# Altium PCB FPv1.3.5.PcbDoc (part 8 of 9)
Units mil, origin at the board's own origin, x right, y up, seen from the top; angles counter-clockwise.
Board outline 3200 x 2100 mil, 4 copper layers (Top Layer, GROUND PLANE, POWER PLANE, Bottom Layer); 98 components, 183 nets, 614 pads, 312 vias.
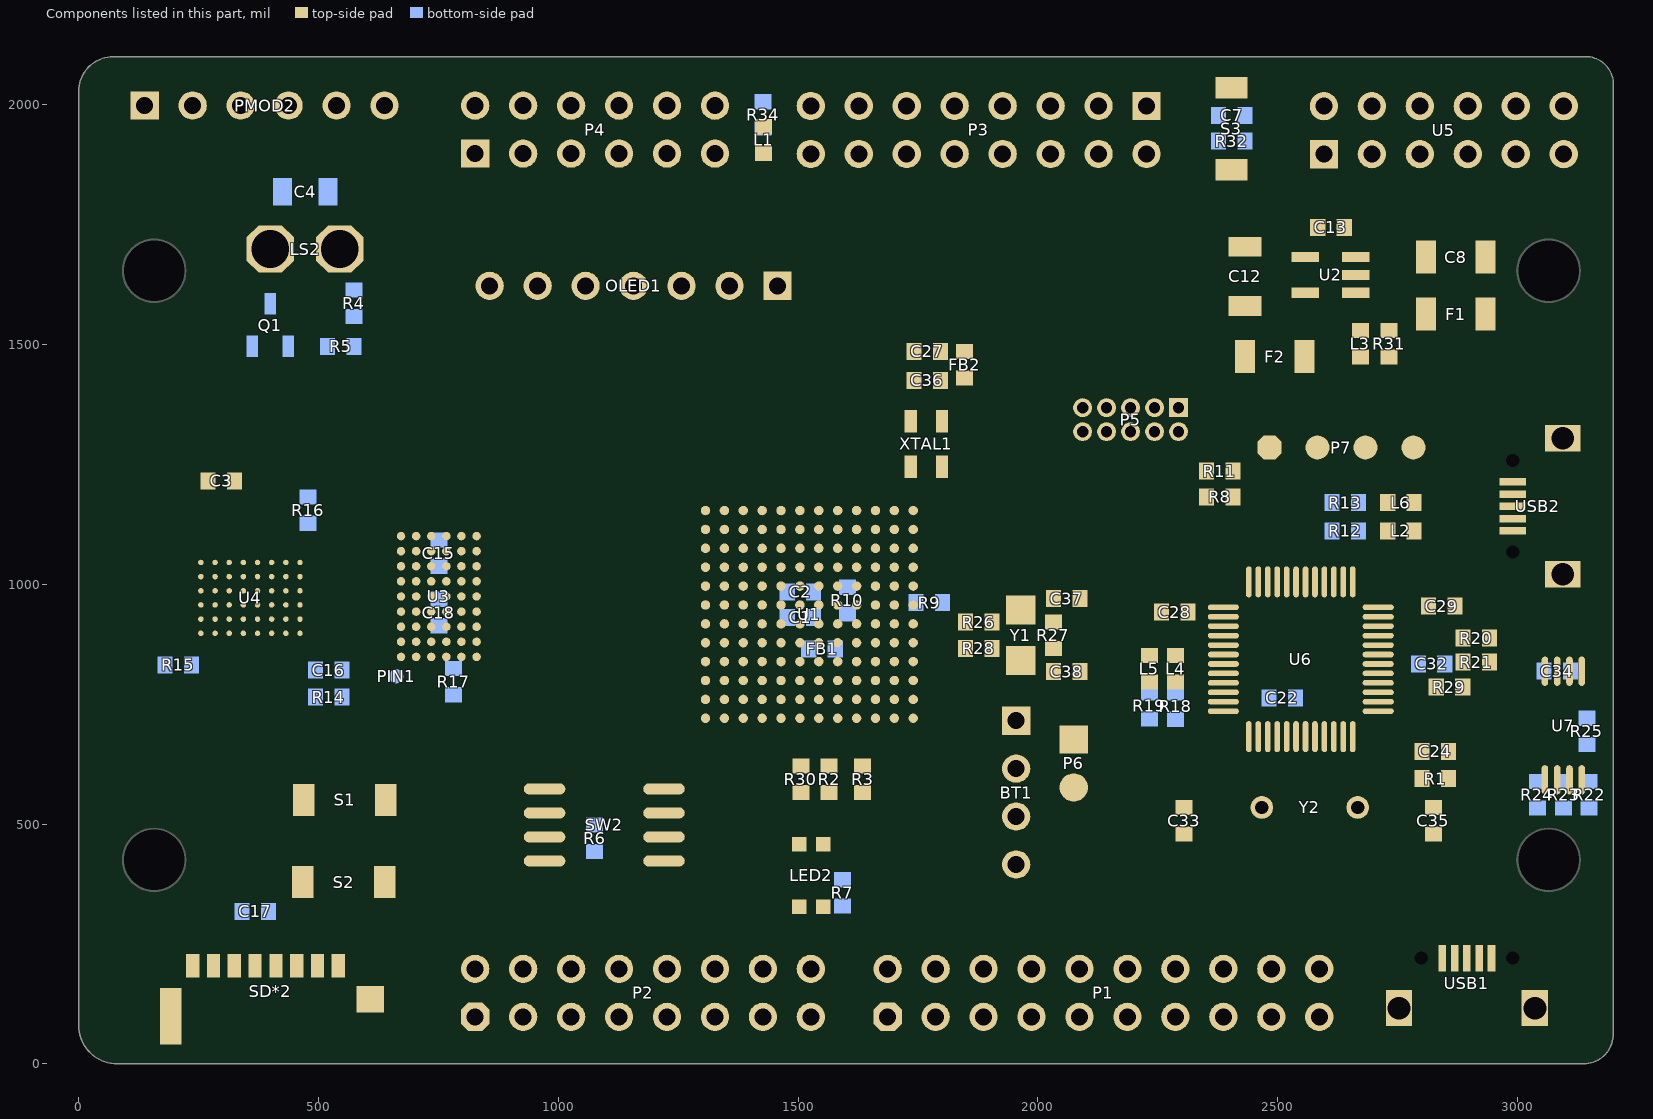
[diagram p10: the components of this part, seen from the top]

## Via types
v1: diameter 15.87, hole 7.87, Top Layer to Bottom Layer, tented both sides, 261 vias
v2: diameter 19.8, hole 11.81, Top Layer to Bottom Layer, tented both sides, 25 vias
v3: diameter 23.62, hole 15.75, Top Layer to Bottom Layer, tented both sides, 11 vias
v4: diameter 20, hole 13, Top Layer to Bottom Layer, tented both sides, 5 vias
v5: diameter 27.68, hole 15.75, Top Layer to Bottom Layer, tented both sides, 3 vias
v6: diameter 23.74, hole 15.75, Top Layer to Bottom Layer, tented both sides, 2 vias
v7: diameter 19.8, hole 9.84, Top Layer to Bottom Layer, tented both sides, 2 vias
v8: diameter 23.62, hole 9.45, Top Layer to Bottom Layer, tented both sides, 1 vias
v9: diameter 17.24, hole 9.06, Top Layer to Bottom Layer, tented both sides, 1 vias
v10: diameter 23.74, hole 11.81, Top Layer to Bottom Layer, tented both sides, 1 vias

## Nets (pads, with @x,y where several pads share a name; then routed paths per layer and width w, separated by ;. In a path a pad name is that pad's centre, name@x,y a point inside that pad or via, vN(x,y) a via of type N, cw(c..) or ccw(c..) an arc to the next point about the centre after c; other vN are vias at no path point) (continued)
copper on no net: (continued)
  Top Layer w1: 2051,1582 2053,1582 ; 2051,1583 2053,1583 ; 2051,1584 2053,1584 ; 2051,1585 2053,1585 ; 2051,1586 2053,1586 ; 2051,1587 2053,1587 ; 2051,1588 2053,1588 ; 2051,1589 2053,1589 ; 2051,1590 2053,1590 ; 2051,1591 2053,1591 ; 2051,1592 2053,1592 ; 2051,1593 2053,1593 ; 2051,1594 2053,1594 ; 2051,1595 2053,1595 ; 2051,1596 2053,1596 ; 2051,1597 2053,1597 ; 2051,1598 2053,1598 ; 2052,1571 2054,1571 ; 2052,1572 2054,1572 ; 2052,1573 2054,1573 ; 2052,1574 2054,1574 ; 2052,1575 2054,1575 ; 2052,1576 2054,1576 ; 2052,1577 2054,1577 ; 2052,1578 2054,1578 ; 2052,1579 2054,1579 ; 2052,1580 2053,1580 ; 2052,1581 2053,1581 ; 2052,1599 2053,1599 ; 2052,1600 2053,1600 ; 2052,1601 2053,1601 ; 2052,1602 2054,1602 ; 2052,1603 2054,1603 ; 2052,1604 2054,1604 ; 2052,1605 2054,1605 ; 2052,1606 2054,1606 ; 2052,1607 2054,1607 ; 2052,1608 2054,1608 ; 2052,1609 2054,1609 ; 2053,1564 2055,1564 ; 2053,1565 2055,1565 ; 2053,1566 2055,1566 ; 2053,1567 2055,1567 ; 2053,1568 2055,1568 ; 2053,1569 2055,1569 ; 2053,1570 2054,1570 ; 2053,1610 2054,1610 ; 2053,1611 2055,1611 ; 2053,1612 2055,1612 ; 2053,1613 2055,1613 ; 2053,1614 2055,1614 ; 2053,1615 2055,1615 ; 2053,1616 2055,1616 ; 2054,1559 2056,1559 ; 2054,1560 2056,1560 ; 2054,1561 2056,1561 ; 2054,1562 2056,1562 ; 2054,1563 2056,1563 ; 2054,1617 2055,1617 ; 2054,1618 2056,1618 ; 2054,1619 2056,1619 ; 2054,1620 2056,1620 ; 2054,1621 2056,1621 ; 2055,1555 2057,1555 ; 2055,1556 2057,1556 ; 2055,1557 2057,1557 ; 2055,1558 2057,1558 ; 2055,1622 2056,1622 ; 2055,1623 2057,1623 ; 2055,1624 2057,1624 ; 2055,1625 2057,1625 ; 2055,1626 2057,1626 ; 2056,1551 2058,1551 ; 2056,1552 2058,1552 ; 2056,1553 2058,1553 ; 2056,1554 2058,1554 ; 2056,1627 2058,1627 ; 2056,1628 2058,1628 ; 2056,1629 2058,1629 ; 2056,1630 2058,1630 ; 2057,1547 2059,1547 ; 2057,1548 2059,1548 ; 2057,1549 2059,1549 ; 2057,1550 2059,1550 ; 2057,1631 2059,1631 ; 2057,1632 2059,1632 ; 2057,1633 2059,1633 ; 2058,1544 2060,1544 ; 2058,1545 2060,1545 ; 2058,1546 2060,1546 ; 2058,1634 2060,1634 ; 2058,1635 2060,1635 ; 2058,1636 2060,1636 ; 2058,1637 2061,1637 ; 2059,1541 2061,1541 ; 2059,1542 2061,1542 ; 2059,1543 2061,1543 ; 2059,1638 2061,1638 ; 2059,1639 2061,1639 ; 2059,1640 2062,1640 ; 2060,1538 2062,1538 ; 2060,1539 2062,1539 ; 2060,1540 2062,1540 ; 2060,1641 2062,1641 ; 2060,1642 2062,1642 ; 2060,1643 2063,1643 ; 2061,1535 2064,1535 ; 2061,1536 2063,1536 ; 2061,1537 2063,1537 ; 2061,1644 2063,1644 ; 2061,1645 2063,1645 ; 2062,1533 2064,1533 ; 2062,1534 2064,1534 ; 2062,1593 2064,1593 ; 2062,1594 2064,1594 ; 2062,1595 2064,1595 ; 2062,1596 2064,1596 ; 2062,1597 2064,1597 ; 2062,1646 2064,1646 ; 2062,1647 2064,1647 ; 2062,1648 2065,1648 ; 2063,1530 2066,1530 ; 2063,1531 2065,1531 ; 2063,1532 2065,1532 ; 2063,1591 2066,1591 ; 2063,1592 2065,1592 ; 2063,1598 2065,1598 ; 2063,1599 2066,1599 ; 2063,1649 2065,1649 ; 2063,1650 2065,1650 ; 2064,1528 2067,1528 ; 2064,1529 2066,1529 ; 2064,1569 2083,1569 ; 2064,1570 2082,1570 ; 2064,1581 2083,1581 ; 2064,1582 2083,1582 ; 2064,1590 2068,1590 ; 2064,1600 2081,1600 ; 2064,1610 2068,1610 ; 2064,1611 2069,1611 ; 2064,1621 2069,1621 ; 2064,1622 2068,1622 ; 2064,1651 2066,1651 ; 2064,1652 2066,1652 ; 2065,1526 2067,1526 ; 2065,1527 2067,1527 ; 2065,1589 2081,1589 ; 2065,1601 2081,1601 ; 2065,1609 2072,1609 ; 2065,1623 2071,1623 ; 2065,1653 2067,1653 ; 2065,1654 2067,1654 ; 2066,1524 2068,1524 ; 2066,1525 2068,1525 ; 2066,1563 2074,1563 ; 2066,1564 2069,1564 ; 2066,1612 2073,1612 ; 2066,1620 2073,1620 ; 2066,1655 2068,1655 ; 2066,1656 2068,1656 ; 2066,1657 2069,1657 ; 2067,1522 2069,1522 ; 2067,1523 2069,1523 ; 2067,1588 2081,1588 ; 2067,1658 2069,1658 ; 2067,1659 2070,1659 ; 2068,1520 2070,1520 ; 2068,1521 2070,1521 ; 2068,1549 2070,1549 ; 2068,1550 2072,1550 ; 2068,1624 2076,1624 ; 2068,1660 2070,1660 ; 2068,1661 2071,1661 ; 2069,1518 2072,1518 ; 2069,1519 2071,1519 ; 2069,1551 2073,1551 ; 2069,1562 2079,1562 ; 2069,1608 2076,1608 ; 2069,1662 2071,1662 ; 2070,1516 2073,1516 ; 2070,1517 2072,1517 ; 2070,1544 2075,1544 ; 2070,1613 2077,1613 ; 2070,1619 2077,1619 ; 2070,1663 2072,1663 ; 2070,1664 2072,1664 ; 2071,1514 2074,1514 ; 2071,1515 2073,1515 ; 2071,1543 2072,1543 ; 2071,1545 2077,1545 ; 2071,1552 2075,1552 ; 2071,1665 2073,1665 ; 2071,1666 2073,1666 ; 2072,1513 2074,1513 ; 2072,1553 2077,1553 ; 2072,1559 2074,1559 ; 2072,1560 2074,1560 ; 2072,1561 2084,1561 ; 2072,1625 2080,1625 ; 2072,1667 2074,1667 ; 2072,1668 2075,1668 ; 2073,1511 2076,1511 ; 2073,1512 2075,1512 ; 2073,1554 2078,1554 ; 2073,1555 2075,1555 ; 2073,1556 2075,1556 ; 2073,1557 2074,1557 ; 2073,1558 2074,1558 ; 2073,1571 2075,1571 ; 2073,1572 2075,1572 ; 2073,1573 2075,1573 ; 2073,1574 2075,1574 ; 2073,1575 2075,1575 ; 2073,1576 2075,1576 ; 2073,1577 2075,1577 ; 2073,1578 2075,1578 ; 2073,1579 2075,1579 ; 2073,1580 2075,1580 ; 2073,1607 2080,1607 ; 2073,1669 2075,1669 ; 2074,1509 2077,1509 ; 2074,1510 2076,1510 ; 2074,1546 2080,1546 ; 2074,1614 2080,1614 ; 2074,1618 2080,1618 ; 2074,1670 2076,1670 ; 2074,1671 2077,1671 ; 2075,1508 2077,1508 ; 2075,1532 2078,1532 ; 2075,1533 2080,1533 ; 2075,1534 2083,1534 ; 2075,1672 2077,1672 ; 2075,1673 2078,1673 ; 2076,1506 2079,1506 ; 2076,1507 2078,1507 ; 2076,1535 2079,1535 ; 2076,1536 2079,1536 ; 2076,1547 2082,1547 ; 2076,1555 2080,1555 ; 2076,1606 2083,1606 ; 2076,1626 2083,1626 ; 2076,1674 2078,1674 ; 2077,1505 2079,1505 ; 2077,1537 2080,1537 ; 2077,1615 2083,1615 ; 2077,1617 2082,1617 ; 2077,1675 2079,1675 ; 2077,1676 2080,1676 ; 2078,1503 2081,1503 ; 2078,1504 2080,1504 ; 2078,1538 2080,1538 ; 2078,1539 2081,1539 ; 2078,1556 2082,1556 ; 2078,1677 2081,1677 ; 2079,1502 2082,1502 ; 2079,1540 2082,1540 ; 2079,1548 2087,1548 ; 2079,1557 2083,1557 ; 2079,1560 2085,1560 ; 2079,1678 2081,1678 ; 2079,1679 2082,1679 ; 2080,1500 2083,1500 ; 2080,1501 2082,1501 ; 2080,1535 2085,1535 ; 2080,1541 2082,1541 ; 2080,1542 2083,1542 ; 2080,1605 2083,1605 ; 2080,1616 2082,1616 ; 2080,1627 2083,1627 ; 2080,1680 2083,1680 ; 2081,1499 2084,1499 ; 2081,1543 2084,1543 ; 2081,1549 2088,1549 ; 2081,1558 2085,1558 ; 2081,1681 2083,1681 ; 2082,1498 2085,1498 ; 2082,1536 2088,1536 ; 2082,1544 2084,1544 ; 2082,1682 2084,1682 ; 2082,1683 2085,1683 ; 2083,1497 2085,1497 ; 2083,1545 2085,1545 ; 2083,1546 2086,1546 ; 2083,1559 2085,1559 ; 2083,1684 2086,1684 ; 2084,1495 2087,1495 ; 2084,1496 2086,1496 ; 2084,1513 2087,1513 ; 2084,1514 2086,1514 ; 2084,1515 2086,1515 ; 2084,1516 2086,1516 ; 2084,1517 2087,1517 ; 2084,1547 2087,1547 ; 2084,1550 2088,1550 ; 2084,1685 2087,1685 ; 2085,1494 2088,1494 ; 2085,1511 2088,1511 ; 2085,1512 2087,1512 ; 2085,1518 2088,1518 ; 2085,1537 2090,1537 ; 2085,1686 2087,1686 ; 2086,1493 2089,1493 ; 2086,1510 2089,1510 ; 2086,1519 2089,1519 ; 2086,1551 2087,1551 ; 2086,1687 2088,1687 ; 2086,1688 2089,1688 ; 2087,1492 2089,1492 ; 2087,1509 2096,1509 ; 2087,1520 2090,1520 ; 2087,1538 2092,1538 ; 2087,1689 2090,1689 ; 2088,1490 2091,1490 ; 2088,1491 2090,1491 ; 2088,1521 2091,1521 ; 2088,1690 2091,1690 ; 2089,1489 2092,1489 ; 2089,1508 2094,1508 ; 2089,1522 2092,1522 ; 2089,1691 2092,1691 ; 2090,1488 2093,1488 ; 2090,1523 2093,1523 ; 2090,1539 2092,1539 ; 2090,1692 2093,1692 ; 2091,1487 2094,1487 ; 2091,1524 2094,1524 ; 2091,1693 2093,1693 ; 2092,1486 2095,1486 ; 2092,1525 2095,1525 ; 2092,1579 2103,1579 ; 2092,1580 2103,1580 ; 2092,1581 2103,1581 ; 2092,1582 2103,1582 ; 2092,1583 2103,1583 ; 2092,1584 2103,1584 ; 2092,1585 2103,1585 ; 2092,1586 2103,1586 ; 2092,1587 2103,1587 ; 2092,1588 2104,1588 ; 2092,1589 2104,1589 ; 2092,1590 2104,1590 ; 2092,1591 2104,1591 ; 2092,1592 2104,1592 ; 2092,1593 2105,1593 ; 2092,1594 2105,1594 ; 2092,1595 2105,1595 ; 2092,1596 2105,1596 ; 2092,1597 2106,1597 ; 2092,1598 2106,1598 ; 2092,1599 2106,1599 ; 2092,1600 2107,1600 ; 2092,1601 2107,1601 ; 2092,1694 2094,1694 ; 2093,1485 2096,1485 ; 2093,1510 2097,1510 ; 2093,1526 2096,1526 ; 2093,1572 2102,1572 ; 2093,1573 2102,1573 ; 2093,1574 2102,1574 ; 2093,1575 2102,1575 ; 2093,1576 2102,1576 ; 2093,1577 2102,1577 ; 2093,1578 2102,1578 ; 2093,1602 2107,1602 ; 2093,1603 2108,1603 ; 2093,1604 2108,1604 ; 2093,1605 2108,1605 ; 2093,1606 2109,1606 ; 2093,1607 2109,1607 ; 2093,1608 2110,1608 ; 2093,1609 2110,1609 ; 2093,1695 2095,1695 ; 2093,1696 2096,1696 ; 2094,1484 2097,1484 ; 2094,1501 2097,1501 ; 2094,1527 2096,1527 ; 2094,1566 2103,1566 ; 2094,1567 2103,1567 ; 2094,1568 2102,1568 ; 2094,1569 2102,1569 ; 2094,1570 2102,1570 ; 2094,1571 2102,1571 ; 2094,1610 2110,1610 ; 2094,1611 2111,1611 ; 2094,1612 2111,1612 ; 2094,1613 2112,1613 ; 2094,1614 2112,1614 ; 2094,1697 2097,1697 ; 2095,1483 2098,1483 ; 2095,1500 2096,1500 ; 2095,1502 2098,1502 ; 2095,1511 2098,1511 ; 2095,1562 2103,1562 ; 2095,1563 2103,1563 ; 2095,1564 2103,1564 ; 2095,1565 2103,1565 ; 2095,1615 2113,1615 ; 2095,1616 2113,1616 ; 2095,1617 2114,1617 ; 2095,1618 2114,1618 ; 2095,1698 2098,1698 ; 2096,1482 2099,1482 ; 2096,1503 2099,1503 ; 2096,1512 2099,1512 ; 2096,1559 2104,1559 ; 2096,1560 2103,1560 ; 2096,1561 2103,1561 ; 2096,1619 2115,1619 ; 2096,1620 2115,1620 ; 2096,1621 2116,1621 ; 2096,1622 2117,1622 ; 2096,1699 2099,1699 ; 2097,1481 2100,1481 ; 2097,1504 2100,1504 ; 2097,1513 2100,1513 ; 2097,1555 2105,1555 ; 2097,1556 2104,1556 ; 2097,1557 2104,1557 ; 2097,1558 2104,1558 ; 2097,1623 2117,1623 ; 2097,1624 2118,1624 ; 2097,1625 2118,1625 ; 2097,1700 2100,1700 ; 2098,1480 2101,1480 ; 2098,1505 2101,1505 ; 2098,1514 2101,1514 ; 2098,1553 2105,1553 ; 2098,1554 2105,1554 ; 2098,1626 2119,1626 ; 2098,1627 2120,1627 ; 2098,1628 2120,1628 ; 2098,1701 2101,1701 ; 2099,1479 2102,1479 ; 2099,1506 2102,1506 ; 2099,1515 2102,1515 ; 2099,1550 2106,1550 ; 2099,1551 2106,1551 ; 2099,1552 2105,1552 ; 2099,1629 2121,1629 ; 2099,1630 2122,1630 ; 2099,1631 2123,1631 ; 2099,1693 2104,1693 ; 2099,1694 2104,1694 ; 2099,1702 2102,1702 ; 2100,1478 2103,1478 ; 2100,1507 2103,1507 ; 2100,1516 2103,1516 ; 2100,1547 2107,1547 ; 2100,1548 2107,1548 ; 2100,1549 2106,1549 ; 2100,1632 2123,1632 ; 2100,1633 2124,1633 ; 2100,1692 2105,1692 ; 2100,1695 2102,1695 ; 2101,1477 2104,1477 ; 2101,1508 2104,1508 ; 2101,1517 2104,1517 ; 2101,1545 2108,1545 ; 2101,1546 2107,1546 ; 2101,1634 2125,1634 ; 2101,1635 2126,1635 ; 2101,1669 2105,1669 ; 2101,1670 2105,1670 ; 2101,1671 2105,1671 ; 2101,1680 2104,1680 ; 2101,1691 2106,1691 ; 2101,1703 2104,1703 ; 2102,1476 2105,1476 ; 2102,1509 2105,1509 ; 2102,1518 2105,1518 ; 2102,1543 2109,1543 ; 2102,1544 2108,1544 ; 2102,1636 2126,1636 ; 2102,1637 2127,1637 ; 2102,1638 2128,1638 ; 2102,1672 2106,1672 ; 2102,1681 2105,1681 ; 2102,1682 2105,1682 ; 2102,1690 2106,1690 ; 2102,1704 2105,1704 ; 2103,1475 2106,1475 ; 2103,1492 2105,1492 ; 2103,1493 2106,1493 ; 2103,1494 2107,1494 ; 2103,1495 2108,1495 ; 2103,1496 2109,1496 ; 2103,1510 2108,1510 ; 2103,1519 2104,1519 ; 2103,1541 2109,1541 ; 2103,1542 2109,1542 ; 2103,1639 2129,1639 ; 2103,1640 2130,1640 ; 2103,1673 2106,1673 ; 2103,1674 2106,1674 ; 2103,1683 2105,1683 ; 2103,1684 2106,1684 ; 2103,1685 2105,1685 ; 2103,1689 2107,1689 ; 2103,1705 2106,1705 ; 2104,1474 2108,1474 ; 2104,1497 2106,1497 ; 2104,1498 2106,1498 ; 2104,1499 2106,1499 ; 2104,1500 2106,1500 ; 2104,1501 2106,1501 ; 2104,1511 2108,1511 ; 2104,1539 2111,1539 ; 2104,1540 2110,1540 ; 2104,1641 2131,1641 ; 2104,1642 2132,1642 ; 2104,1675 2108,1675 ; 2104,1688 2107,1688 ; 2104,1706 2107,1706 ; 2105,1502 2107,1502 ; 2105,1503 2107,1503 ; 2105,1504 2107,1504 ; 2105,1505 2107,1505 ; 2105,1506 2107,1506 ; 2105,1512 2109,1512 ; 2105,1537 2112,1537 ; 2105,1538 2111,1538 ; 2105,1643 2133,1643 ; 2105,1644 2134,1644 ; 2105,1676 2107,1676 ; 2105,1677 2108,1677 ; 2105,1687 2108,1687 ; 2105,1707 2108,1707 ; 2106,1473 2109,1473 ; 2106,1507 2108,1507 ; 2106,1508 2108,1508 ; 2106,1509 2108,1509 ; 2106,1513 2108,1513 ; 2106,1535 2114,1535 ; 2106,1536 2113,1536 ; 2106,1645 2135,1645 ; 2106,1678 2111,1678 ; 2106,1679 2110,1679 ; 2106,1686 2109,1686 ; 2106,1708 2109,1708 ; 2107,1472 2110,1472 ; 2107,1497 2110,1497 ; 2107,1533 2116,1533 ; 2107,1534 2115,1534 ; 2107,1646 2136,1646 ; 2107,1647 2137,1647 ; 2107,1668 2109,1668 ; 2107,1669 2108,1669 ; 2107,1680 2110,1680 ; 2107,1681 2113,1681 ; 2107,1684 2111,1684 ; 2107,1685 2112,1685 ; 2107,1709 2111,1709 ; 2108,1471 2111,1471 ; 2108,1498 2111,1498 ; 2108,1532 2117,1532 ; 2108,1648 2138,1648 ; 2108,1649 2139,1649 ; 2108,1658 2111,1658 ; 2108,1659 2112,1659 ; 2108,1665 2109,1665 ; 2108,1666 2110,1666 ; 2108,1667 2110,1667 ; 2108,1671 2110,1671 ; 2108,1672 2111,1672 ; 2108,1673 2111,1673 ; 2108,1674 2111,1674 ; 2108,1682 2112,1682 ; 2108,1683 2111,1683 ; 2108,1693 2113,1693 ; 2109,1470 2113,1470 ; 2109,1499 2112,1499 ; 2109,1530 2120,1530 ; 2109,1531 2118,1531 ; 2109,1650 2140,1650 ; 2109,1660 2112,1660 ; 2109,1661 2113,1661 ; 2109,1662 2113,1662 ; 2109,1675 2116,1675 ; 2109,1677 2112,1677 ; 2109,1692 2113,1692 ; 2109,1710 2112,1710 ; 2110,1485 2111,1485 ; 2110,1486 2112,1486 ; 2110,1487 2113,1487 ; 2110,1500 2113,1500 ; 2110,1529 2121,1529 ; 2110,1651 2142,1651 ; 2110,1652 2143,1652 ; 2110,1663 2114,1663 ; 2110,1664 2114,1664 ; 2110,1676 2123,1676 ; 2110,1686 2112,1686 ; 2110,1691 2113,1691 ; 2110,1711 2113,1711 ; 2111,1469 2114,1469 ; 2111,1488 2114,1488 ; 2111,1501 2114,1501 ; 2111,1527 2125,1527 ; 2111,1528 2123,1528 ; 2111,1653 2144,1653 ; 2111,1665 2114,1665 ; 2111,1680 2114,1680 ; 2111,1690 2113,1690 ; 2111,1712 2115,1712 ; 2112,1468 2115,1468 ; 2112,1489 2115,1489 ; 2112,1502 2115,1502 ; 2112,1526 2128,1526 ; 2112,1654 2146,1654 ; 2112,1655 2147,1655 ; 2112,1666 2114,1666 ; 2112,1667 2114,1667 ; 2112,1668 2115,1668 ; 2112,1674 2115,1674 ; 2112,1679 2115,1679 ; 2112,1689 2113,1689 ; 2112,1713 2116,1713 ; 2113,1467 2117,1467 ; 2113,1490 2117,1490 ; 2113,1503 2116,1503 ; 2113,1524 2136,1524 ; 2113,1525 2131,1525 ; 2113,1656 2148,1656 ; 2113,1669 2115,1669 ; 2113,1670 2115,1670 ; 2113,1671 2115,1671 ; 2113,1673 2115,1673 ; 2113,1678 2116,1678 ; 2114,1466 2118,1466 ; 2114,1491 2117,1491 ; 2114,1504 2117,1504 ; 2114,1523 2252,1523 ; 2114,1657 2150,1657 ; 2114,1658 2152,1658 ; 2114,1672 2115,1672 ; 2114,1677 2117,1677 ; 2114,1714 2117,1714 ; 2115,1492 2118,1492 ; 2115,1505 2116,1505 ; 2115,1522 2251,1522 ; 2115,1659 2154,1659 ; 2115,1715 2119,1715 ; 2116,1465 2119,1465 ; 2116,1493 2119,1493 ; 2116,1520 2250,1520 ; 2116,1521 2251,1521 ; 2116,1660 2155,1660 ; 2117,1464 2121,1464 ; 2117,1494 2120,1494 ; 2117,1519 2249,1519 ; 2117,1661 2196,1661 ; 2117,1675 2123,1675 ; 2117,1681 2119,1681 ; 2117,1682 2118,1682 ; 2117,1716 2120,1716 ; 2118,1477 2123,1477 ; 2118,1478 2125,1478 ; 2118,1495 2122,1495 ; 2118,1518 2249,1518 ; 2118,1662 2197,1662 ; 2118,1663 2199,1663 ; 2118,1677 2122,1677 ; 2118,1678 2121,1678 ; 2118,1679 2121,1679 ; 2118,1680 2120,1680 ; 2118,1717 2122,1717 ; 2119,1463 2122,1463 ; 2119,1476 2121,1476 ; 2119,1479 2121,1479 ; 2119,1480 2121,1480 ; 2119,1496 2122,1496 ; 2119,1517 2248,1517 ; 2119,1664 2200,1664 ; 2119,1674 2124,1674 ; 2120,1462 2124,1462 ; 2120,1481 2122,1481 ; 2120,1482 2122,1482 ; 2120,1483 2122,1483 ; 2120,1497 2123,1497 ; 2120,1516 2248,1516 ; 2120,1665 2201,1665 ; 2120,1672 2124,1672 ; 2120,1673 2124,1673 ; 2120,1718 2123,1718 ; 2121,1484 2123,1484 ; 2121,1485 2123,1485 ; 2121,1486 2123,1486 ; 2121,1498 2124,1498 ; 2121,1514 2246,1514 ; 2121,1515 2247,1515 ; 2121,1666 2203,1666 ; 2121,1719 2125,1719 ; 2122,1461 2126,1461 ; 2122,1487 2124,1487 ; 2122,1488 2124,1488 ; 2122,1489 2125,1489 ; 2122,1513 2245,1513 ; 2122,1667 2204,1667 ; 2122,1671 2124,1671 ; 2123,1460 2127,1460 ; 2123,1479 2126,1479 ; 2123,1490 2125,1490 ; 2123,1491 2125,1491 ; 2123,1492 2126,1492 ; 2123,1512 2245,1512 ; 2123,1668 2205,1668 ; 2123,1720 2126,1720 ; 2124,1480 2128,1480 ; 2124,1493 2126,1493 ; 2124,1494 2126,1494 ; 2124,1495 2126,1495 ; 2124,1511 2244,1511 ; 2124,1669 2207,1669 ; 2124,1721 2128,1721 ; 2125,1459 2129,1459 ; 2125,1510 2243,1510 ; 2125,1670 2208,1670 ; 2126,1481 2130,1481 ; 2126,1509 2242,1509 ; 2126,1671 2210,1671 ; 2126,1722 2130,1722 ; 2127,1458 2131,1458 ; 2127,1508 2242,1508 ; 2127,1672 2211,1672 ; 2128,1457 2132,1457 ; 2128,1469 2131,1469 ; 2128,1482 2132,1482 ; 2128,1507 2241,1507 ; 2128,1673 2213,1673 ; 2128,1723 2132,1723 ; 2129,1468 2133,1468 ; 2129,1470 2132,1470 ; 2129,1506 2240,1506 ; 2129,1674 2214,1674 ; 2129,1724 2134,1724 ; 2130,1456 2134,1456 ; 2130,1471 2133,1471 ; 2130,1472 2133,1472 ; 2130,1483 2134,1483 ; 2130,1675 2216,1675 ; 2131,1467 2134,1467 ; 2131,1473 2134,1473 ; 2131,1505 2239,1505 ; 2131,1676 2218,1676 ; 2131,1725 2135,1725 ; 2132,1455 2136,1455 ; 2132,1466 2135,1466 ; 2132,1474 2139,1474 ; 2132,1484 2136,1484 ; 2132,1504 2238,1504 ; 2132,1677 2219,1677 ; 2133,1465 2137,1465 ; 2133,1475 2137,1475 ; 2133,1485 2137,1485 ; 2133,1503 2237,1503 ; 2133,1716 2136,1716 ; 2133,1717 2135,1717 ; 2133,1718 2134,1718 ; 2133,1726 2137,1726 ; 2134,1454 2138,1454 ; 2134,1464 2138,1464 ; 2134,1476 2137,1476 ; 2134,1477 2137,1477 ; 2134,1502 2236,1502 ; 2134,1678 2221,1678 ; 2134,1711 2137,1711 ; 2134,1712 2137,1712 ; 2134,1713 2136,1713 ; 2134,1714 2136,1714 ; 2134,1715 2136,1715 ; 2135,1478 2138,1478 ; 2135,1486 2136,1486 ; 2135,1679 2223,1679 ; 2135,1710 2136,1710 ; 2135,1727 2139,1727 ; 2136,1453 2140,1453 ; 2136,1463 2139,1463 ; 2136,1479 2139,1479 ; 2136,1501 2235,1501 ; 2136,1680 2225,1680 ; 2136,1707 2140,1707 ; 2137,1462 2140,1462 ; 2137,1473 2140,1473 ; 2137,1480 2140,1480 ; 2137,1481 2143,1481 ; 2137,1500 2234,1500 ; 2137,1594 2154,1594 ; 2137,1595 2154,1595 ; 2137,1596 2155,1596 ; 2137,1597 2155,1597 ; 2137,1704 2141,1704 ; 2137,1705 2141,1705 ; 2137,1706 2140,1706 ; 2137,1708 2138,1708 ; 2137,1728 2142,1728 ; 2138,1452 2143,1452 ; 2138,1461 2139,1461 ; 2138,1472 2141,1472 ; 2138,1482 2141,1482 ; 2138,1499 2233,1499 ; 2138,1582 2153,1582 ; 2138,1583 2153,1583 ; 2138,1584 2153,1584 ; 2138,1585 2153,1585 ; 2138,1586 2153,1586 ; 2138,1587 2154,1587 ; 2138,1588 2154,1588 ; 2138,1589 2154,1589 ; 2138,1590 2154,1590 ; 2138,1591 2154,1591 ; 2138,1592 2154,1592 ; 2138,1593 2154,1593 ; 2138,1598 2155,1598 ; 2138,1599 2155,1599 ; 2138,1600 2156,1600 ; 2138,1601 2156,1601 ; 2138,1602 2156,1602 ; 2138,1603 2156,1603 ; 2138,1604 2157,1604 ; 2138,1605 2157,1605 ; 2138,1606 2157,1606 ; 2138,1607 2158,1607 ; 2138,1608 2158,1608 ; 2138,1609 2158,1609 ; 2138,1610 2159,1610 ; 2138,1681 2227,1681 ; 2138,1698 2142,1698 ; 2138,1699 2142,1699 ; 2138,1700 2142,1700 ; 2138,1701 2142,1701 ; 2138,1702 2141,1702 ; 2138,1703 2141,1703 ; 2139,1471 2143,1471 ; 2139,1483 2140,1483 ; 2139,1577 2154,1577 ; 2139,1578 2153,1578 ; 2139,1579 2153,1579 ; 2139,1580 2153,1580 ; 2139,1581 2153,1581 ; 2139,1611 2159,1611 ; 2139,1612 2159,1612 ; 2139,1613 2160,1613 ; 2139,1614 2160,1614 ; 2139,1615 2161,1615 ; 2139,1616 2161,1616 ; 2139,1682 2229,1682 ; 2139,1695 2142,1695 ; 2139,1696 2142,1696 ; 2139,1697 2142,1697 ; 2139,1729 2144,1729 ; 2140,1451 2145,1451 ; 2140,1498 2232,1498 ; 2140,1574 2154,1574 ; 2140,1575 2154,1575 ; 2140,1576 2154,1576 ; 2140,1617 2161,1617 ; 2140,1618 2162,1618 ; 2140,1619 2162,1619 ; 2140,1620 2163,1620 ; 2140,1621 2163,1621 ; 2140,1683 2231,1683 ; 2140,1690 2143,1690 ; 2140,1691 2143,1691 ; 2140,1692 2143,1692 ; 2140,1693 2143,1693 ; 2140,1694 2142,1694 ; 2140,1711 2141,1711 ; 2140,1712 2144,1712 ; 2141,1470 2144,1470 ; 2141,1480 2144,1480 ; 2141,1497 2231,1497 ; 2141,1570 2154,1570 ; 2141,1571 2154,1571 ; 2141,1572 2154,1572 ; 2141,1573 2154,1573 ; 2141,1622 2164,1622 ; 2141,1623 2165,1623 ; 2141,1624 2165,1624 ; 2141,1625 2166,1625 ; 2141,1713 2144,1713 ; 2141,1730 2146,1730 ; 2142,1450 2147,1450 ; 2142,1469 2144,1469 ; 2142,1479 2145,1479 ; 2142,1568 2155,1568 ; 2142,1569 2155,1569 ; 2142,1626 2166,1626 ; 2142,1627 2167,1627 ; 2142,1628 2167,1628 ; 2142,1684 2233,1684 ; 2142,1714 2150,1714 ; 2142,1715 2150,1715 ; 2142,1718 2147,1718 ; 2142,1719 2147,1719 ; 2142,1722 2144,1722 ; 2143,1478 2146,1478 ; 2143,1496 2230,1496 ; 2143,1565 2156,1565 ; 2143,1566 2155,1566 ; 2143,1567 2155,1567 ; 2143,1629 2168,1629 ; 2143,1630 2169,1630 ; 2143,1631 2169,1631 ; 2143,1685 2235,1685 ; 2143,1716 2149,1716 ; 2143,1717 2147,1717 ; 2143,1721 2147,1721 ; 2144,1449 2150,1449 ; 2144,1495 2229,1495 ; 2144,1563 2156,1563 ; 2144,1564 2156,1564 ; 2144,1632 2170,1632 ; 2144,1633 2171,1633 ; 2144,1634 2171,1634 ; 2144,1703 2146,1703 ; 2144,1704 2147,1704 ; 2144,1705 2154,1705 ; 2144,1709 2146,1709 ; 2144,1710 2146,1710 ; 2144,1711 2150,1711 ; 2144,1720 2147,1720 ; 2144,1731 2148,1731 ; 2145,1459 2148,1459 ; 2145,1477 2148,1477 ; 2145,1561 2157,1561 ; 2145,1562 2157,1562 ; 2145,1635 2172,1635 ; 2145,1636 2173,1636 ; 2145,1637 2173,1637 ; 2145,1686 2238,1686 ; 2145,1706 2147,1706 ; 2145,1707 2147,1707 ; 2145,1708 2150,1708 ; 2145,1713 2149,1713 ; 2145,1722 2147,1722 ; 2145,1723 2147,1723 ; 2145,1724 2147,1724 ; 2145,1725 2147,1725 ; 2146,1458 2147,1458 ; 2146,1460 2148,1460 ; 2146,1461 2149,1461 ; 2146,1476 2149,1476 ; 2146,1494 2228,1494 ; 2146,1560 2157,1560 ; 2146,1638 2174,1638 ; 2146,1639 2175,1639 ; 2146,1640 2176,1640 ; 2146,1712 2149,1712 ; 2146,1732 2151,1732 ; 2147,1448 2152,1448 ; 2147,1462 2149,1462 ; 2147,1463 2149,1463 ; 2147,1464 2150,1464 ; 2147,1475 2150,1475 ; 2147,1493 2227,1493 ; 2147,1558 2158,1558 ; 2147,1559 2158,1559 ; 2147,1641 2176,1641 ; 2147,1642 2177,1642 ; 2147,1687 2240,1687 ; 2147,1701 2151,1701 ; 2148,1465 2155,1465 ; 2148,1466 2152,1466 ; 2148,1557 2159,1557 ; 2148,1643 2178,1643 ; 2148,1644 2179,1644 ; 2148,1688 2243,1688 ; 2148,1702 2151,1702 ; 2148,1703 2152,1703 ; 2148,1706 2151,1706 ; 2148,1707 2154,1707 ; 2148,1709 2151,1709 ; 2148,1710 2151,1710 ; 2148,1733 2154,1733 ; 2149,1447 2155,1447 ; 2149,1467 2151,1467 ; 2149,1468 2152,1468 ; 2149,1492 2260,1492 ; 2149,1555 2160,1555 ; 2149,1556 2160,1556 ; 2149,1645 2180,1645 ; 2149,1646 2181,1646 ; 2149,1647 2182,1647 ; 2149,1697 2150,1697 ; 2149,1698 2151,1698 ; 2149,1699 2151,1699 ; 2149,1700 2151,1700 ; 2149,1704 2153,1704 ; 2150,1469 2152,1469 ; 2150,1470 2152,1470 ; 2150,1471 2153,1471 ; 2150,1554 2161,1554 ; 2150,1648 2183,1648 ; 2150,1649 2184,1649 ; 2150,1689 2245,1689 ; 2151,1472 2153,1472 ; 2151,1473 2157,1473 ; 2151,1491 2259,1491 ; 2151,1553 2162,1553 ; 2151,1650 2184,1650 ; 2151,1651 2185,1651 ; 2151,1734 2157,1734 ; 2152,1446 2158,1446 ; 2152,1464 2157,1464 ; 2152,1474 2155,1474 ; 2152,1552 2163,1552 ; 2152,1652 2186,1652 ; 2152,1653 2187,1653 ; 2152,1690 2258,1690 ; 2152,1706 2154,1706 ; 2153,1490 2257,1490 ; 2153,1551 2164,1551 ; 2153,1654 2188,1654 ; 2153,1702 2154,1702 ; 2153,1708 2154,1708 ; 2154,1463 2162,1463 ; 2154,1524 2252,1524 ; 2154,1550 2165,1550 ; 2154,1655 2190,1655 ; 2154,1656 2191,1656 ; 2154,1691 2256,1691 ; 2154,1697 2155,1697 ; 2154,1698 2157,1698 ; 2154,1699 2157,1699 ; 2154,1700 2157,1700 ; 2154,1701 2156,1701 ; 2154,1735 2160,1735 ; 2155,1445 2161,1445 ; 2155,1462 2158,1462 ; 2155,1472 2159,1472 ; 2155,1489 2255,1489 ; 2155,1549 2167,1549 ; 2155,1657 2192,1657 ; 2155,1658 2193,1658 ; 2156,1457 2159,1457 ; 2156,1458 2159,1458 ; 2156,1459 2158,1459 ; 2156,1460 2158,1460 ; 2156,1461 2158,1461 ; 2156,1548 2168,1548 ; 2156,1659 2194,1659 ; 2156,1660 2195,1660 ; 2156,1692 2254,1692 ; 2156,1736 2163,1736 ; 2157,1453 2160,1453 ; 2157,1454 2159,1454 ; 2157,1455 2159,1455 ; 2157,1456 2159,1456 ; 2157,1471 2161,1471 ; 2157,1488 2253,1488 ; 2158,1444 2165,1444 ; 2158,1547 2170,1547 ; 2158,1693 2252,1693 ; 2159,1462 2160,1462 ; 2159,1470 2163,1470 ; 2159,1487 2251,1487 ; 2159,1546 2172,1546 ; 2160,1464 2163,1464 ; 2160,1525 2253,1525 ; 2160,1694 2249,1694 ; 2160,1737 2167,1737 ; 2161,1443 2168,1443 ; 2161,1465 2164,1465 ; 2161,1469 2164,1469 ; 2161,1486 2248,1486 ; 2161,1545 2175,1545 ; 2162,1466 2164,1466 ; 2162,1467 2164,1467 ; 2162,1468 2164,1468 ; 2163,1544 2178,1544 ; 2163,1695 2247,1695 ; 2163,1738 2171,1738 ; 2164,1485 2246,1485 ; 2165,1442 2173,1442 ; 2165,1526 2253,1526 ; 2165,1543 2183,1543 ; 2165,1696 2244,1696 ; 2166,1453 2169,1453 ; 2166,1454 2168,1454 ; 2166,1455 2168,1455 ; 2166,1456 2167,1456 ; 2166,1463 2169,1463 ; 2166,1464 2168,1464 ; 2166,1465 2168,1465 ; 2166,1484 2243,1484 ; 2167,1452 2178,1452 ; 2167,1461 2173,1461 ; 2167,1462 2170,1462 ; 2167,1466 2169,1466 ; 2167,1467 2171,1467 ; 2167,1542 2259,1542 ; 2167,1739 2175,1739 ; 2168,1468 2177,1468 ; 2168,1527 2254,1527 ; 2168,1697 2241,1697 ; 2169,1441 2178,1441 ; 2169,1451 2177,1451 ; 2169,1460 2177,1460 ; 2169,1483 2240,1483 ; 2171,1469 2174,1469 ; 2171,1541 2196,1541 ; 2171,1698 2238,1698 ; 2171,1740 2181,1740 ; 2172,1459 2178,1459 ; 2172,1528 2254,1528 ; 2173,1440 2184,1440 ; 2173,1482 2237,1482 ; 2174,1467 2178,1467 ; 2174,1699 2235,1699 ; 2175,1529 2255,1529 ; 2176,1453 2179,1453 ; 2176,1458 2179,1458 ; 2176,1466 2179,1466 ; 2176,1481 2233,1481 ; 2176,1540 2190,1540 ; 2176,1726 2184,1726 ; 2176,1741 2189,1741 ; 2177,1454 2180,1454 ; 2177,1457 2180,1457 ; 2177,1464 2179,1464 ; 2177,1465 2179,1465 ; 2177,1530 2255,1530 ; 2177,1725 2180,1725 ; 2177,1727 2184,1727 ; 2178,1439 2193,1439 ; 2178,1455 2180,1455 ; 2178,1456 2180,1456 ; 2178,1700 2231,1700 ; 2178,1716 2184,1716 ; 2178,1717 2185,1717 ; 2179,1708 2182,1708 ; 2179,1709 2183,1709 ; 2179,1710 2183,1710 ; 2179,1711 2183,1711 ; 2179,1712 2183,1712 ; 2179,1728 2184,1728 ; 2180,1531 2255,1531 ; 2180,1713 2183,1713 ; 2180,1718 2185,1718 ; 2180,1729 2184,1729 ; 2181,1480 2229,1480 ; 2181,1714 2183,1714 ; 2181,1715 2184,1715 ; 2181,1719 2183,1719 ; 2181,1720 2183,1720 ; 2181,1721 2183,1721 ; 2181,1722 2183,1722 ; 2181,1723 2183,1723 ; 2181,1724 2183,1724 ; 2181,1725 2183,1725 ; 2182,1532 2256,1532 ; 2182,1742 2228,1742 ; 2183,1701 2227,1701 ; 2184,1533 2256,1533 ; 2185,1438 2225,1438 ; 2185,1479 2224,1479 ; 2185,1729 2187,1729 ; 2185,1730 2186,1730 ; 2186,1724 2195,1724 ; 2186,1725 2195,1725 ; 2186,1726 2189,1726 ; 2186,1727 2189,1727 ; 2186,1728 2188,1728 ; 2187,1448 2189,1448 ; 2187,1449 2189,1449 ; 2187,1450 2189,1450 ; 2187,1451 2189,1451 ; 2187,1452 2189,1452 ; 2187,1453 2189,1453 ; 2187,1454 2189,1454 ; 2187,1455 2189,1455 ; 2187,1456 2189,1456 ; 2187,1457 2189,1457 ; 2187,1458 2189,1458 ; 2187,1459 2189,1459 ; 2187,1460 2189,1460 ; 2187,1461 2189,1461 ; 2187,1462 2189,1462 ; 2187,1463 2189,1463 ; 2187,1464 2189,1464 ; 2187,1465 2189,1465 ; 2187,1466 2189,1466 ; 2187,1534 2257,1534 ; 2187,1714 2193,1714 ; 2188,1713 2192,1713 ; 2188,1715 2194,1715 ; 2188,1730 2193,1730 ; 2189,1535 2257,1535 ; 2189,1702 2221,1702 ; 2189,1708 2197,1708 ; 2189,1709 2198,1709 ; 2189,1710 2198,1710 ; 2189,1711 2192,1711 ; 2189,1712 2192,1712 ; 2189,1716 2194,1716 ; 2189,1717 2194,1717 ; 2189,1718 2191,1718 ; 2189,1719 2191,1719 ; 2189,1720 2192,1720 ; 2189,1721 2192,1721 ; 2189,1722 2194,1722 ; 2189,1731 2193,1731 ; 2189,1743 2220,1743 ; 2190,1723 2194,1723 ; 2190,1726 2195,1726 ; 2190,1732 2193,1732 ; 2191,1536 2257,1536 ; 2191,1727 2193,1727 ; 2191,1728 2192,1728 ; 2191,1729 2193,1729 ; 2191,1733 2194,1733 ; 2192,1537 2258,1537 ; 2192,1734 2200,1734 ; 2193,1465 2207,1465 ; 2193,1466 2208,1466 ; 2193,1478 2217,1478 ; 2193,1735 2200,1735 ; 2194,1538 2258,1538 ; 2194,1711 2197,1711 ; 2194,1727 2196,1727 ; 2194,1728 2196,1728 ; 2195,1729 2196,1729 ; 2195,1730 2197,1730 ; 2195,1731 2198,1731 ; 2195,1732 2199,1732 ; 2195,1733 2199,1733 ; 2195,1736 2199,1736 ; 2196,1437 2214,1437 ; 2196,1539 2258,1539 ; 2196,1737 2197,1737 ; 2198,1540 2259,1540 ; 2199,1449 2201,1449 ; 2199,1450 2201,1450 ; 2199,1451 2201,1451 ; 2199,1452 2201,1452 ; 2199,1453 2201,1453 ; 2199,1454 2201,1454 ; 2199,1455 2201,1455 ; 2199,1456 2201,1456 ; 2199,1457 2201,1457 ; 2199,1458 2201,1458 ; 2199,1459 2201,1459 ; 2199,1460 2201,1460 ; 2199,1461 2201,1461 ; 2199,1462 2201,1462 ; 2199,1463 2201,1463 ; 2199,1464 2201,1464 ; 2199,1541 2259,1541 ; 2199,1600 2215,1600 ; 2199,1601 2217,1601 ; 2199,1602 2218,1602 ; 2199,1603 2219,1603 ; 2199,1604 2221,1604 ; 2199,1605 2222,1605 ; 2199,1606 2223,1606 ; 2199,1607 2225,1607 ; 2199,1608 2226,1608 ; 2199,1609 2228,1609 ; 2199,1610 2229,1610 ; 2199,1611 2230,1611 ; 2199,1612 2232,1612 ; 2199,1613 2233,1613 ; 2199,1614 2235,1614 ; 2200,1595 2209,1595 ; 2200,1596 2210,1596 ; 2200,1597 2211,1597 ; 2200,1598 2212,1598 ; 2200,1599 2214,1599 ; 2200,1615 2236,1615 ; 2200,1616 2238,1616 ; 2200,1617 2239,1617 ; 2200,1618 2241,1618 ; 2200,1619 2243,1619 ; 2200,1620 2244,1620 ; 2200,1621 2246,1621 ; 2200,1703 2210,1703 ; 2201,1592 2205,1592 ; 2201,1593 2206,1593 ; 2201,1594 2207,1594 ; 2201,1622 2247,1622 ; 2201,1623 2249,1623 ; 2201,1624 2251,1624 ; 2201,1625 2253,1625 ; 2202,1589 2252,1589 ; 2202,1590 2250,1590 ; 2202,1591 2249,1591 ; 2202,1626 2255,1626 ; 2202,1627 2257,1627 ; 2202,1628 2260,1628 ; 2202,1629 2262,1629 ; 2203,1587 2254,1587 ; 2203,1588 2253,1588 ; 2203,1630 2265,1630 ; 2203,1631 2268,1631 ; 2203,1632 2271,1632 ; 2204,1543 2259,1543 ; 2204,1585 2256,1585 ; 2204,1586 2255,1586 ; 2204,1633 2275,1633 ; 2204,1634 2280,1634 ; 2204,1635 2308,1635 ; 2205,1583 2257,1583 ; 2205,1584 2256,1584 ; 2205,1636 2308,1636 ; 2205,1637 2308,1637 ; 2206,1582 2257,1582 ; 2206,1638 2307,1638 ; 2206,1639 2307,1639 ; 2206,1640 2306,1640 ; 2207,1580 2258,1580 ; 2207,1581 2258,1581 ; 2207,1592 2247,1592 ; 2207,1641 2306,1641 ; 2207,1642 2305,1642 ; 2208,1579 2258,1579 ; 2208,1643 2305,1643 ; 2208,1644 2304,1644 ; 2209,1578 2259,1578 ; 2209,1645 2304,1645 ; 2209,1646 2303,1646 ; 2210,1577 2259,1577 ; 2210,1647 2302,1647 ; 2210,1648 2302,1648 ; 2211,1544 2259,1544 ; 2211,1576 2259,1576 ; 2211,1593 2244,1593 ; 2211,1649 2301,1649 ; 2211,1650 2301,1650 ; 2212,1464 2215,1464 ; 2212,1465 2214,1465 ; 2212,1575 2259,1575 ; 2212,1651 2300,1651 ; 2212,1652 2299,1652 ; 2212,1714 2236,1714 ; 2213,1463 2216,1463 ; 2213,1574 2260,1574 ; 2213,1653 2299,1653 ; 2213,1712 2221,1712 ; 2213,1713 2227,1713 ; 2213,1715 2236,1715 ; 2214,1461 2217,1461 ; 2214,1462 2216,1462 ; 2214,1573 2260,1573 ; 2214,1654 2298,1654 ; 2214,1655 2297,1655 ; 2214,1711 2218,1711 ; 2215,1460 2218,1460 ; 2215,1656 2297,1656 ; 2215,1657 2296,1657 ; 2215,1710 2216,1710 ; 2216,1439 2231,1439 ; 2216,1458 2219,1458 ; 2216,1459 2218,1459 ; 2216,1545 2260,1545 ; 2216,1572 2260,1572 ; 2216,1594 2241,1594 ; 2216,1658 2295,1658 ; 2217,1457 2222,1457 ; 2217,1571 2260,1571 ; 2217,1659 2294,1659 ; 2217,1660 2294,1660 ; 2218,1455 2221,1455 ; 2218,1456 2222,1456 ; 2218,1661 2293,1661 ; 2219,1447 2220,1447 ; 2219,1448 2221,1448 ; 2219,1449 2221,1449 ; 2219,1450 2221,1450 ; 2219,1451 2221,1451 ; 2219,1452 2221,1452 ; 2219,1453 2221,1453 ; 2219,1454 2221,1454 ; 2219,1570 2260,1570 ; 2219,1662 2292,1662 ; 2219,1663 2291,1663 ; 2220,1664 2290,1664 ; 2221,1458 2223,1458 ; 2221,1459 2224,1459 ; 2221,1546 2260,1546 ; 2221,1569 2260,1569 ; 2221,1665 2289,1665 ; 2221,1741 2234,1741 ; 2222,1460 2224,1460 ; 2222,1666 2288,1666 ; 2222,1667 2288,1667 ; 2222,1716 2229,1716 ; 2223,1461 2225,1461 ; 2223,1462 2226,1462 ; 2223,1568 2261,1568 ; 2223,1668 2287,1668 ; 2224,1463 2226,1463 ; 2224,1547 2260,1547 ; 2224,1669 2286,1669 ; 2224,1717 2229,1717 ; 2224,1728 2233,1728 ; 2224,1729 2227,1729 ; 2225,1440 2237,1440 ; 2225,1464 2227,1464 ; 2225,1465 2228,1465 ; 2225,1567 2261,1567 ; 2225,1595 2233,1595 ; 2225,1670 2285,1670 ; 2225,1718 2230,1718 ; 2225,1725 2230,1725 ; 2225,1726 2238,1726 ; 2225,1727 2237,1727 ; 2226,1671 2284,1671 ; 2226,1719 2231,1719 ; 2227,1672 2283,1672 ; 2227,1673 2282,1673 ; 2228,1493 2233,1493 ; 2228,1548 2260,1548 ; 2228,1674 2280,1674 ; 2228,1720 2232,1720 ; 2229,1566 2261,1566 ; 2229,1675 2279,1675 ; 2229,1721 2233,1721 ; 2229,1740 2239,1740 ; 2230,1676 2278,1676 ; 2230,1722 2234,1722 ; 2231,1494 2232,1494 ; 2231,1549 2260,1549 ; 2231,1677 2277,1677 ; 2232,1441 2241,1441 ; 2232,1565 2261,1565 ; 2232,1678 2276,1678 ; 2232,1723 2235,1723 ; 2233,1679 2275,1679 ; 2233,1716 2236,1716 ; 2233,1724 2238,1724 ; 2234,1493 2262,1493 ; 2234,1725 2238,1725 ; 2234,1728 2236,1728 ; 2234,1739 2243,1739 ; 2235,1550 2260,1550 ; 2235,1680 2273,1680 ; 2236,1494 2264,1494 ; 2236,1564 2261,1564 ; 2236,1681 2272,1681 ; 2237,1442 2245,1442 ; 2237,1461 2240,1461 ; 2237,1462 2240,1462 ; 2237,1463 2240,1463 ; 2237,1464 2240,1464 ; 2237,1495 2266,1495 ; 2237,1551 2261,1551 ; 2237,1682 2271,1682 ; 2238,1458 2241,1458 ; 2238,1459 2240,1459 ; 2238,1460 2240,1460 ; 2238,1465 2240,1465 ; 2238,1466 2240,1466 ; 2238,1467 2241,1467 ; 2238,1496 2267,1496 ; 2238,1683 2269,1683 ; 2239,1456 2242,1456 ; 2239,1457 2241,1457 ; 2239,1468 2242,1468 ; 2239,1497 2242,1497 ; 2239,1684 2268,1684 ; 2239,1738 2247,1738 ; 2240,1455 2244,1455 ; 2240,1469 2243,1469 ; 2240,1498 2243,1498 ; 2240,1552 2261,1552 ; 2241,1443 2249,1443 ; 2241,1470 2246,1470 ; 2241,1499 2243,1499 ; 2241,1685 2266,1685 ; 2242,1454 2251,1454 ; 2242,1471 2250,1471 ; 2242,1500 2243,1500 ; 2242,1686 2265,1686 ; 2243,1501 2244,1501 ; 2243,1553 2261,1553 ; 2243,1563 2261,1563 ; 2243,1737 2250,1737 ; 2244,1453 2248,1453 ; 2244,1687 2263,1687 ; 2245,1444 2252,1444 ; 2245,1497 2268,1497 ; 2245,1554 2261,1554 ; 2246,1498 2270,1498 ; 2246,1688 2261,1688 ; 2247,1470 2251,1470 ; 2247,1689 2259,1689 ; 2247,1736 2253,1736 ; 2248,1445 2255,1445 ; 2248,1455 2252,1455 ; 2248,1499 2271,1499 ; 2248,1555 2261,1555 ; 2249,1469 2253,1469 ; 2249,1500 2273,1500 ; 2249,1501 2274,1501 ; 2250,1456 2253,1456 ; 2250,1502 2275,1502 ; 2250,1556 2261,1556 ; 2250,1735 2256,1735 ; 2251,1457 2254,1457 ; 2251,1467 2254,1467 ; 2251,1468 2253,1468 ; 2251,1503 2276,1503 ; 2252,1446 2258,1446 ; 2252,1458 2254,1458 ; 2252,1459 2254,1459 ; 2252,1460 2255,1460 ; 2252,1464 2255,1464 ; 2252,1465 2255,1465 ; 2252,1466 2254,1466 ; 2252,1504 2278,1504 ; 2252,1505 2279,1505 ; 2252,1557 2261,1557 ; 2253,1461 2255,1461 ; 2253,1462 2255,1462 ; 2253,1463 2255,1463 ; 2253,1506 2280,1506 ; 2253,1507 2281,1507 ; 2253,1734 2259,1734 ; 2254,1508 2255,1508 ; 2254,1698 2262,1698 ; 2255,1447 2260,1447 ; 2255,1558 2261,1558 ; 2255,1697 2260,1697 ; 2256,1705 2269,1705 ; 2256,1706 2271,1706 ; 2256,1733 2261,1733 ; 2257,1448 2263,1448 ; 2257,1473 2260,1473 ; 2257,1474 2259,1474 ; 2257,1475 2260,1475 ; 2257,1476 2262,1476 ; 2257,1508 2282,1508 ; 2257,1559 2261,1559 ; 2257,1704 2268,1704 ; 2258,1471 2261,1471 ; 2258,1472 2260,1472 ; 2258,1509 2260,1509 ; 2258,1510 2260,1510 ; 2258,1699 2263,1699 ; 2258,1703 2262,1703 ; 2258,1732 2264,1732 ; 2259,1468 2264,1468 ; 2259,1469 2266,1469 ; 2259,1470 2261,1470 ; 2259,1477 2265,1477 ; 2259,1511 2261,1511 ; 2259,1512 2261,1512 ; 2259,1560 2261,1560 ; 2260,1449 2265,1449 ; 2260,1466 2262,1466 ; 2260,1467 2262,1467 ; 2260,1513 2261,1513 ; 2260,1514 2262,1514 ; 2261,1463 2264,1463 ; 2261,1464 2263,1464 ; 2261,1465 2263,1465 ; 2261,1509 2283,1509 ; 2261,1515 2262,1515 ; 2261,1516 2262,1516 ; 2261,1517 2262,1517 ; 2261,1700 2264,1700 ; 2261,1731 2266,1731 ; 2262,1450 2267,1450 ; 2262,1460 2265,1460 ; 2262,1461 2264,1461 ; 2262,1462 2264,1462 ; 2262,1478 2267,1478 ; 2262,1510 2263,1510 ; 2262,1511 2263,1511 ; 2262,1701 2265,1701 ; 2263,1459 2264,1459 ; 2263,1702 2266,1702 ; 2264,1470 2269,1470 ; 2264,1479 2268,1479 ; 2264,1703 2268,1703 ; 2264,1730 2268,1730 ; 2265,1451 2270,1451 ; 2265,1510 2284,1510 ; 2265,1707 2276,1707 ; 2266,1471 2270,1471 ; 2266,1511 2285,1511 ; 2266,1708 2277,1708 ; 2266,1729 2270,1729 ; 2267,1452 2272,1452 ; 2267,1480 2268,1480 ; 2267,1512 2286,1512 ; 2267,1513 2287,1513 ; 2267,1691 2275,1691 ; 2267,1692 2273,1692 ; 2267,1693 2271,1693 ; 2267,1694 2270,1694 ; 2267,1695 2270,1695 ; 2267,1696 2269,1696 ; 2267,1697 2269,1697 ; 2267,1698 2269,1698 ; 2267,1699 2268,1699 ; 2267,1700 2268,1700 ; 2267,1701 2268,1701 ; 2267,1702 2268,1702 ; 2267,1709 2271,1709 ; 2268,1472 2270,1472 ; 2268,1514 2288,1514 ; 2268,1710 2271,1710 ; 2268,1711 2272,1711 ; 2268,1712 2272,1712 ; 2268,1728 2273,1728 ; 2269,1453 2274,1453 ; 2269,1515 2289,1515 ; 2269,1516 2290,1516 ; 2269,1713 2273,1713 ; 2269,1714 2273,1714 ; 2269,1715 2274,1715 ; 2270,1517 2291,1517 ; 2270,1518 2292,1518 ; 2270,1716 2274,1716 ; 2270,1717 2274,1717 ; 2270,1727 2275,1727 ; 2271,1454 2276,1454 ; 2271,1519 2292,1519 ; 2271,1718 2274,1718 ; 2271,1719 2274,1719 ; 2271,1720 2273,1720 ; 2272,1483 2274,1483 ; 2272,1484 2275,1484 ; 2272,1520 2293,1520 ; 2272,1521 2294,1521 ; 2272,1721 2273,1721 ; 2272,1726 2277,1726 ; 2273,1455 2278,1455 ; 2273,1485 2277,1485 ; 2273,1522 2277,1522 ; 2273,1709 2276,1709 ; 2274,1523 2276,1523 ; 2274,1725 2278,1725 ; 2275,1456 2279,1456 ; 2275,1486 2280,1486 ; 2276,1487 2280,1487 ; 2276,1724 2280,1724 ; 2277,1457 2281,1457 ; 2278,1485 2281,1485 ; 2278,1488 2281,1488 ; 2278,1522 2295,1522 ; 2278,1723 2282,1723 ; 2279,1458 2283,1458 ; 2279,1483 2282,1483 ; 2279,1484 2281,1484 ; 2279,1489 2283,1489 ; 2279,1523 2296,1523 ; 2280,1482 2283,1482 ; 2280,1490 2284,1490 ; 2280,1524 2296,1524 ; 2280,1525 2297,1525 ; 2280,1722 2284,1722 ; 2281,1459 2284,1459 ; 2281,1480 2284,1480 ; 2281,1481 2283,1481 ; 2281,1526 2298,1526 ; 2281,1527 2298,1527 ; 2281,1721 2285,1721 ; 2282,1460 2286,1460 ; 2282,1479 2285,1479 ; 2282,1491 2284,1491 ; 2282,1528 2299,1528 ; 2282,1529 2300,1529 ; 2283,1477 2286,1477 ; 2283,1478 2285,1478 ; 2283,1530 2300,1530 ; 2283,1531 2301,1531 ; 2283,1720 2287,1720 ; 2284,1461 2288,1461 ; 2284,1476 2287,1476 ; 2284,1532 2288,1532 ; 2284,1533 2288,1533 ; 2285,1474 2288,1474 ; 2285,1475 2287,1475 ; 2285,1494 2289,1494 ; 2285,1534 2289,1534 ; 2285,1535 2289,1535 ; 2285,1719 2288,1719 ; 2286,1462 2289,1462 ; 2286,1473 2288,1473 ; 2286,1493 2289,1493 ; 2286,1495 2289,1495 ; 2286,1536 2289,1536 ; 2286,1537 2289,1537 ; 2286,1538 2289,1538 ; 2286,1673 2293,1673 ; 2286,1674 2288,1674 ; 2286,1675 2287,1675 ; 2286,1718 2290,1718 ; 2287,1463 2291,1463 ; 2287,1492 2290,1492 ; 2287,1496 2290,1496 ; 2287,1539 2289,1539 ; 2287,1540 2289,1540 ; 2287,1670 2289,1670 ; 2287,1671 2291,1671 ; 2287,1672 2292,1672 ; 2287,1683 2292,1683 ; 2287,1684 2291,1684 ; 2288,1491 2291,1491 ; 2288,1541 2289,1541 ; 2288,1542 2289,1542 ; 2288,1543 2289,1543 ; 2288,1681 2296,1681 ; 2288,1682 2294,1682 ; 2288,1685 2289,1685 ; 2288,1717 2291,1717 ; 2289,1464 2292,1464 ; 2289,1490 2292,1490 ; 2289,1497 2292,1497 ; 2289,1716 2293,1716 ; 2290,1465 2294,1465 ; 2290,1489 2294,1489 ; 2290,1498 2293,1498 ; 2290,1532 2302,1532 ; 2291,1488 2294,1488 ; 2291,1499 2294,1499 ; 2291,1533 2302,1533 ; 2291,1674 2295,1674 ; 2291,1680 2298,1680 ; 2291,1715 2294,1715 ; 2292,1466 2295,1466 ; 2292,1487 2295,1487 ; 2292,1500 2295,1500 ; 2292,1534 2303,1534 ; 2292,1535 2303,1535 ; 2292,1714 2296,1714 ; 2293,1467 2296,1467 ; 2293,1485 2296,1485 ; 2293,1486 2296,1486 ; 2293,1490 2296,1490 ; 2293,1501 2296,1501 ; 2293,1536 2304,1536 ; 2293,1634 2309,1634 ; 2293,1675 2297,1675 ; 2294,1468 2298,1468 ; 2294,1484 2297,1484 ; 2294,1491 2297,1491 ; 2294,1502 2296,1502 ; 2294,1537 2304,1537 ; 2294,1713 2297,1713 ; 2295,1483 2301,1483 ; 2295,1492 2298,1492 ; 2295,1538 2305,1538 ; 2295,1539 2305,1539 ; 2295,1676 2298,1676 ; 2295,1679 2299,1679 ; 2295,1712 2298,1712 ; 2296,1469 2299,1469 ; 2296,1482 2299,1482 ; 2296,1493 2299,1493 ; 2296,1540 2306,1540 ; 2296,1633 2309,1633 ; 2296,1677 2304,1677 ; 2296,1711 2300,1711 ; 2297,1470 2300,1470 ; 2297,1481 2298,1481 ; 2297,1494 2300,1494 ; 2297,1541 2306,1541 ; 2297,1542 2307,1542 ; 2297,1678 2308,1678 ; 2298,1471 2301,1471 ; 2298,1495 2301,1495 ; 2298,1543 2307,1543 ; 2298,1632 2310,1632 ; 2298,1710 2301,1710 ; 2299,1484 2302,1484 ; 2299,1496 2300,1496 ; 2299,1503 2302,1503 ; 2299,1504 2301,1504 ; 2299,1505 2301,1505 ; 2299,1506 2301,1506 ; 2299,1507 2301,1507 ; 2299,1508 2301,1508 ; 2299,1509 2302,1509 ; 2299,1544 2308,1544 ; 2299,1545 2308,1545 ; 2299,1674 2303,1674 ; 2299,1683 2302,1683 ; 2299,1684 2300,1684 ; 2299,1709 2302,1709 ; 2300,1472 2303,1472 ; 2300,1485 2303,1485 ; 2300,1501 2303,1501 ; 2300,1502 2302,1502 ; 2300,1510 2302,1510 ; 2300,1546 2309,1546 ; 2300,1547 2309,1547 ; 2300,1631 2310,1631 ; 2300,1673 2303,1673 ; 2300,1675 2303,1675 ; 2300,1682 2304,1682 ; 2300,1708 2303,1708 ; 2301,1473 2304,1473 ; 2301,1486 2304,1486 ; 2301,1500 2304,1500 ; 2301,1511 2303,1511 ; 2301,1548 2310,1548 ; 2301,1549 2310,1549 ; 2301,1630 2310,1630 ; 2301,1676 2303,1676 ; 2301,1687 2302,1687 ; 2301,1707 2304,1707 ; 2302,1474 2305,1474 ; 2302,1487 2305,1487 ; 2302,1499 2305,1499 ; 2302,1512 2305,1512 ; 2302,1550 2310,1550 ; 2302,1551 2311,1551 ; 2302,1629 2311,1629 ; 2302,1688 2308,1688 ; 2302,1689 2308,1689 ; 2303,1475 2306,1475 ; 2303,1488 2306,1488 ; 2303,1498 2307,1498 ; 2303,1513 2310,1513 ; 2303,1552 2311,1552 ; 2303,1553 2311,1553 ; 2303,1554 2312,1554 ; 2303,1628 2311,1628 ; 2303,1681 2305,1681 ; 2303,1685 2305,1685 ; 2303,1687 2307,1687 ; 2303,1690 2309,1690 ; 2303,1691 2306,1691 ; 2303,1706 2306,1706 ; 2304,1476 2307,1476 ; 2304,1489 2307,1489 ; 2304,1497 2313,1497 ; 2304,1555 2312,1555 ; 2304,1556 2312,1556 ; 2304,1627 2311,1627 ; 2304,1679 2309,1679 ; 2304,1680 2307,1680 ; 2304,1686 2305,1686 ; 2304,1692 2307,1692 ; 2304,1705 2307,1705 ; 2305,1490 2307,1490 ; 2305,1514 2308,1514 ; 2305,1557 2313,1557 ; 2305,1558 2313,1558 ; 2305,1559 2313,1559 ; 2305,1626 2312,1626 ; 2305,1677 2308,1677 ; 2305,1693 2307,1693 ; 2305,1704 2308,1704 ; 2306,1477 2309,1477 ; 2306,1560 2314,1560 ; 2306,1561 2314,1561 ; 2306,1562 2314,1562 ; 2306,1625 2312,1625 ; 2306,1683 2308,1683 ; 2306,1684 2308,1684 ; 2306,1703 2309,1703 ; 2307,1478 2310,1478 ; 2307,1496 2311,1496 ; 2307,1512 2310,1512 ; 2307,1563 2314,1563 ; 2307,1564 2315,1564 ; 2307,1565 2315,1565 ; 2307,1623 2313,1623 ; 2307,1624 2313,1624 ; 2307,1682 2309,1682 ; 2307,1685 2315,1685 ; 2307,1702 2310,1702 ; 2308,1479 2311,1479 ; 2308,1566 2315,1566 ; 2308,1567 2315,1567 ; 2308,1568 2316,1568 ; 2308,1569 2316,1569 ; 2308,1621 2313,1621 ; 2308,1622 2313,1622 ; 2308,1686 2316,1686 ; 2308,1691 2309,1691 ; 2308,1692 2310,1692 ; 2308,1701 2311,1701 ; 2309,1480 2312,1480 ; 2309,1518 2313,1518 ; 2309,1519 2311,1519 ; 2309,1570 2316,1570 ; 2309,1571 2316,1571 ; 2309,1572 2316,1572 ; 2309,1573 2316,1573 ; 2309,1618 2314,1618 ; 2309,1619 2314,1619 ; 2309,1620 2314,1620 ; 2309,1683 2311,1683 ; 2309,1687 2317,1687 ; 2309,1688 2317,1688 ; 2309,1693 2310,1693 ; 2309,1694 2310,1694 ; 2309,1695 2310,1695 ; 2309,1700 2312,1700 ; 2310,1481 2313,1481 ; 2310,1517 2315,1517 ; 2310,1574 2317,1574 ; 2310,1575 2317,1575 ; 2310,1576 2317,1576 ; 2310,1577 2317,1577 ; 2310,1578 2317,1578 ; 2310,1579 2317,1579 ; 2310,1615 2315,1615 ; 2310,1616 2315,1616 ; 2310,1617 2315,1617 ; 2310,1684 2315,1684 ; 2310,1699 2313,1699 ; 2311,1482 2314,1482 ; 2311,1498 2314,1498 ; 2311,1580 2317,1580 ; 2311,1581 2317,1581 ; 2311,1582 2317,1582 ; 2311,1583 2317,1583 ; 2311,1584 2318,1584 ; 2311,1585 2318,1585 ; 2311,1586 2318,1586 ; 2311,1587 2318,1587 ; 2311,1610 2316,1610 ; 2311,1611 2316,1611 ; 2311,1612 2316,1612 ; 2311,1613 2315,1613 ; 2311,1614 2315,1614 ; 2311,1679 2318,1679 ; 2311,1680 2319,1680 ; 2311,1689 2313,1689 ; 2311,1690 2313,1690 ; 2311,1691 2313,1691 ; 2311,1698 2314,1698 ; 2312,1483 2315,1483 ; 2312,1516 2319,1516 ; 2312,1588 2318,1588 ; 2312,1589 2318,1589 ; 2312,1590 2318,1590 ; 2312,1591 2318,1591 ; 2312,1592 2318,1592 ; 2312,1593 2318,1593 ; 2312,1594 2318,1594 ; 2312,1595 2318,1595 ; 2312,1596 2318,1596 ; 2312,1597 2317,1597 ; 2312,1598 2317,1598 ; 2312,1599 2317,1599 ; 2312,1600 2317,1600 ; 2312,1601 2317,1601 ; 2312,1602 2317,1602 ; 2312,1603 2317,1603 ; 2312,1604 2317,1604 ; 2312,1605 2317,1605 ; 2312,1606 2317,1606 ; 2312,1607 2316,1607 ; 2312,1608 2316,1608 ; 2312,1609 2316,1609 ; 2312,1697 2315,1697 ; 2313,1484 2316,1484 ; 2313,1499 2315,1499 ; 2313,1696 2316,1696 ; 2314,1485 2317,1485 ; 2314,1500 2316,1500 ; 2314,1501 2317,1501 ; 2314,1506 2317,1506 ; 2314,1515 2319,1515 ; 2314,1678 2317,1678 ; 2314,1681 2319,1681 ; 2314,1695 2317,1695 ; 2315,1486 2318,1486 ; 2315,1502 2317,1502 ; 2315,1503 2317,1503 ; 2315,1504 2317,1504 ; 2315,1505 2317,1505 ; 2315,1507 2316,1507 ; 2315,1529 2318,1529 ; 2315,1682 2319,1682 ; 2315,1683 2318,1683 ; 2315,1694 2318,1694 ; 2316,1487 2318,1487 ; 2316,1514 2320,1514 ; 2316,1528 2320,1528 ; 2316,1530 2317,1530 ; 2316,1693 2319,1693 ; 2317,1488 2319,1488 ; 2317,1513 2322,1513 ; 2317,1517 2319,1517 ; 2317,1527 2322,1527 ; 2317,1692 2320,1692 ; 2318,1489 2320,1489 ; 2318,1490 2321,1490 ; 2318,1518 2320,1518 ; 2318,1519 2320,1519 ; 2318,1691 2321,1691 ; 2319,1491 2322,1491 ; 2319,1512 2324,1512 ; 2319,1520 2321,1520 ; 2319,1521 2322,1521 ; 2319,1526 2324,1526 ; 2319,1536 2324,1536 ; 2319,1537 2324,1537 ; 2319,1538 2333,1538 ; 2319,1690 2321,1690 ; 2320,1492 2323,1492 ; 2320,1522 2322,1522 ; 2320,1523 2323,1523 ; 2320,1689 2322,1689 ; 2321,1493 2324,1493 ; 2321,1511 2326,1511 ; 2321,1524 2327,1524 ; 2321,1525 2325,1525 ; 2321,1535 2326,1535 ; 2321,1687 2324,1687 ; 2321,1688 2323,1688 ; 2322,1494 2324,1494 ; 2322,1686 2325,1686 ; 2323,1495 2325,1495 ; 2323,1496 2326,1496 ; 2323,1510 2326,1510 ; 2323,1534 2328,1534 ; 2323,1539 2340,1539 ; 2323,1685 2326,1685 ; 2324,1497 2327,1497 ; 2324,1523 2329,1523 ; 2324,1548 2328,1548 ; 2324,1684 2326,1684 ; 2325,1498 2328,1498 ; 2325,1533 2330,1533 ; 2325,1547 2330,1547 ; 2325,1549 2326,1549 ; 2325,1631 2328,1631 ; 2325,1632 2326,1632 ; 2325,1682 2328,1682 ; 2325,1683 2327,1683 ; 2326,1499 2328,1499 ; 2326,1500 2329,1500 ; 2326,1522 2331,1522 ; 2326,1617 2327,1617 ; 2326,1618 2328,1618 ; 2326,1619 2330,1619 ; 2326,1630 2329,1630 ; 2326,1681 2329,1681 ; 2327,1501 2330,1501 ; 2327,1532 2332,1532 ; 2327,1546 2331,1546 ; 2327,1556 2329,1556 ; 2327,1557 2329,1557 ; 2327,1620 2331,1620 ; 2327,1629 2331,1629 ; 2327,1680 2329,1680 ; 2328,1502 2330,1502 ; 2328,1521 2332,1521 ; 2328,1552 2331,1552 ; 2328,1553 2330,1553 ; 2328,1554 2330,1554 ; 2328,1555 2329,1555 ; 2328,1558 2330,1558 ; 2328,1559 2330,1559 ; 2328,1560 2330,1560 ; 2328,1605 2330,1605 ; 2328,1606 2330,1606 ; 2328,1607 2330,1607 ; 2328,1608 2330,1608 ; 2328,1609 2330,1609 ; 2328,1610 2330,1610 ; 2328,1611 2330,1611 ; 2328,1678 2331,1678 ; 2328,1679 2330,1679 ; 2329,1503 2331,1503 ; 2329,1504 2332,1504 ; 2329,1531 2333,1531 ; 2329,1545 2333,1545 ; 2329,1551 2332,1551 ; 2329,1561 2331,1561 ; 2329,1562 2333,1562 ; 2329,1569 2347,1569 ; 2329,1570 2343,1570 ; 2329,1603 2332,1603 ; 2329,1604 2331,1604 ; 2329,1612 2331,1612 ; 2329,1613 2332,1613 ; 2329,1621 2333,1621 ; 2329,1628 2332,1628 ; 2329,1677 2331,1677 ; 2330,1505 2333,1505 ; 2330,1520 2331,1520 ; 2330,1550 2335,1550 ; 2330,1563 2343,1563 ; 2330,1587 2332,1587 ; 2330,1588 2332,1588 ; 2330,1589 2332,1589 ; 2330,1590 2332,1590 ; 2330,1602 2334,1602 ; 2330,1614 2334,1614 ; 2330,1622 2334,1622 ; 2330,1627 2334,1627 ; 2330,1675 2333,1675 ; 2330,1676 2332,1676 ; 2331,1506 2333,1506 ; 2331,1507 2334,1507 ; 2331,1530 2335,1530 ; 2331,1544 2335,1544 ; 2331,1549 2343,1549 ; 2331,1584 2334,1584 ; 2331,1585 2333,1585 ; 2331,1586 2332,1586 ; 2331,1591 2333,1591 ; 2331,1592 2334,1592 ; 2331,1601 2344,1601 ; 2331,1615 2333,1615 ; 2331,1674 2334,1674 ; 2332,1508 2334,1508 ; 2332,1564 2341,1564 ; 2332,1583 2335,1583 ; 2332,1593 2335,1593 ; 2332,1594 2336,1594 ; 2332,1623 2336,1623 ; 2332,1626 2336,1626 ; 2332,1672 2335,1672 ; 2332,1673 2334,1673 ; 2333,1509 2335,1509 ; 2333,1510 2336,1510 ; 2333,1529 2335,1529 ; 2333,1540 2341,1540 ; 2333,1543 2337,1543 ; 2333,1582 2337,1582 ; 2333,1600 2342,1600 ; 2333,1624 2344,1624 ; 2333,1671 2335,1671 ; 2334,1511 2336,1511 ; 2334,1542 2339,1542 ; 2334,1548 2341,1548 ; 2334,1581 2345,1581 ; 2334,1595 2346,1595 ; 2334,1625 2344,1625 ; 2334,1669 2337,1669 ; 2334,1670 2336,1670 ; 2335,1512 2337,1512 ; 2335,1513 2338,1513 ; 2335,1596 2345,1596 ; 2335,1667 2338,1667 ; 2335,1668 2337,1668 ; 2336,1514 2338,1514 ; 2336,1515 2339,1515 ; 2336,1541 2341,1541 ; 2336,1580 2343,1580 ; 2336,1666 2338,1666 ; 2337,1516 2339,1516 ; 2337,1517 2340,1517 ; 2337,1609 2339,1609 ; 2337,1610 2339,1610 ; 2337,1611 2339,1611 ; 2337,1612 2339,1612 ; 2337,1613 2339,1613 ; 2337,1614 2345,1614 ; 2337,1615 2345,1615 ; 2337,1664 2339,1664 ; 2337,1665 2339,1665 ; 2338,1518 2340,1518 ; 2338,1662 2341,1662 ; 2338,1663 2340,1663 ; 2339,1519 2341,1519 ; 2339,1520 2341,1520 ; 2339,1660 2342,1660 ; 2339,1661 2341,1661 ; 2340,1521 2342,1521 ; 2340,1522 2342,1522 ; 2340,1562 2344,1562 ; 2340,1568 2347,1568 ; 2340,1658 2343,1658 ; 2340,1659 2342,1659 ; 2341,1523 2343,1523 ; 2341,1524 2343,1524 ; 2341,1550 2344,1550 ; 2341,1602 2345,1602 ; 2341,1656 2344,1656 ; 2341,1657 2343,1657 ; 2342,1525 2344,1525 ; 2342,1526 2344,1526 ; 2342,1551 2345,1551 ; 2342,1561 2345,1561 ; 2342,1582 2347,1582 ; 2342,1654 2344,1654 ; 2342,1655 2344,1655 ; 2343,1527 2345,1527 ; 2343,1528 2345,1528